# Altium PCB RoomBug.PcbDoc
Units mm, origin at the board's own origin, x right, y up, seen from the top; angles counter-clockwise.
Board outline 22 x 62 mm, 2 copper layers (Top Layer, Bottom Layer); 23 components, 12 nets, 48 pads, 0 vias.
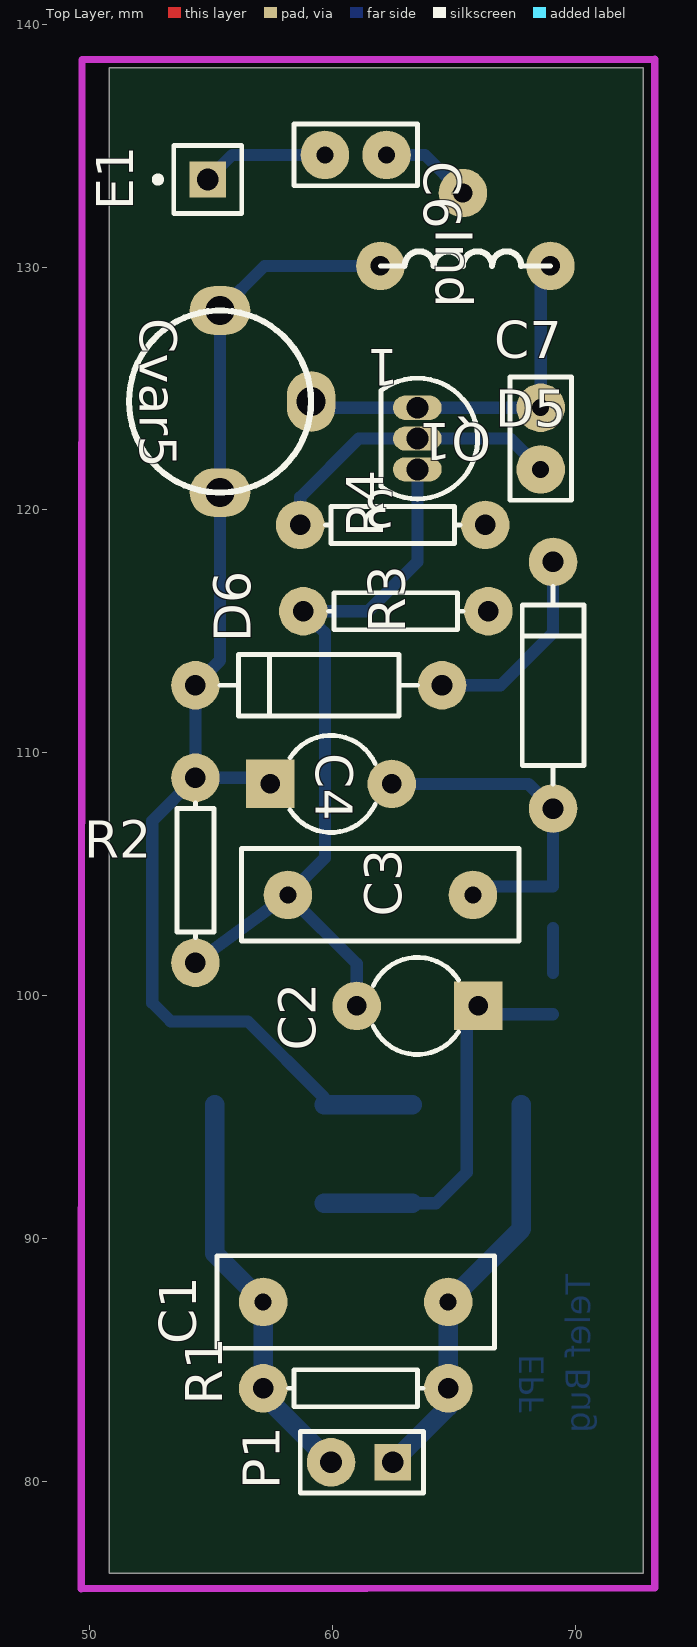
[diagram p0: Top Layer view]
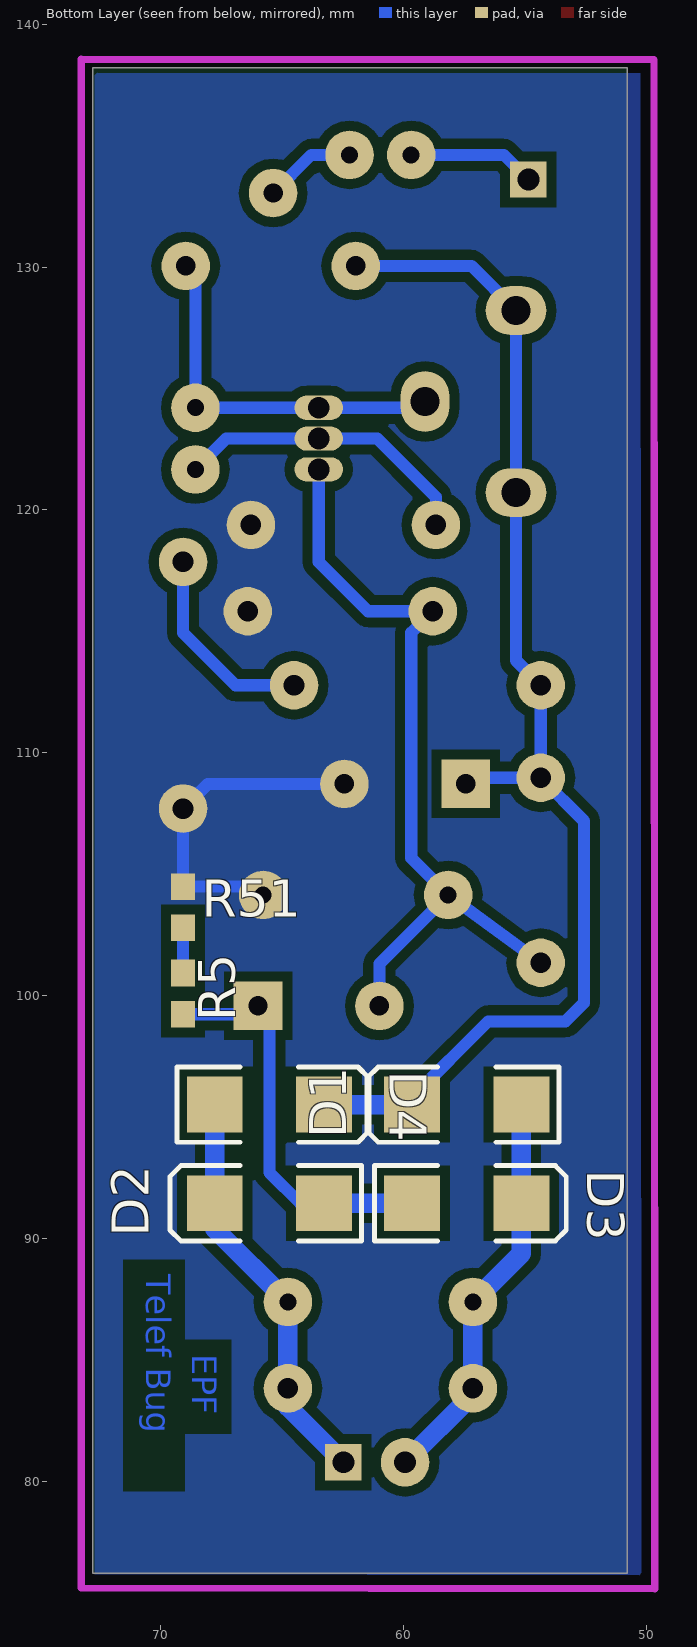
[diagram p1: Bottom Layer view, seen from below]

## Layer stack, top to bottom
Top Layer: signal copper 0.0356
Dielectric: dielectric 0.32, FR-4, Dk 4.8
Bottom Layer: signal copper 0.0356

## Board outline
50.8,76.2 72.8,76.2 72.8,138.2 50.8,138.2

## Design rules (kind name [scope] priority, off if disabled: settings)
Clearance [All] p1: gap=0.4
ComponentClearance [All] p1: gap=0.254 collisioncheckmode=3 verticalgap=0.254
PlaneConnect [All] p1: planeconnectstyle=Relief reliefexpansion=0.508 reliefentries=4 reliefconductorwidth=0.3 reliefairgap=0.254
PolygonConnect [All] p1: connectstyle=Direct reliefconductorwidth=0.254 reliefentries=4 polygonreliefangle="90 Angle"
RoomDefinition RoomBug [InComponentClass('RoomBug')] p1: confinementstyle=ConfineIn formatcopy=TRUE lockcomponents=FALSE outline 72.771,76.073 72.771,138.176 50.165,138.176 50.165,76.073
RoutingVias [All] p1: holewidth=0.8 width=2 viastyle="Through Hole" minholewidth=0.711 minwidth=1.27 maxholewidth=1 maxwidth=2
SolderMaskExpansion [All] p1: expansion=0.102
TestPointUsage [All] p1: valid=0 allowmultiple=FALSE
Testpoint [All] p1: side=15 testpointundercomponent=TRUE minsize=1.016 maxsize=2.54 preferedsize=1.524 minholesize=0 maxholesize=1.016 preferedholesize=0.813 testpointgrid=0.025 style=1023 order=0123456789
Width [All] p1: maxlimit=0.8 minlimit=0.3 preferedwidth=0.5
16 further rules are at their usual default settings.

## Components (designator, comment, footprint, x,y, rotation, side; value= is the part's Value field where it differs from the comment)
C1 "0.1u" RAD-0.3 60.96,87.376 r180 top
C2 "1u" CAPR5-4X5 63.5,99.568 r180 top
C3 "1n" RAD-0.3 61.976,104.14 r180 top
C4 "10u" CAPR5-4X5 59.944,108.712 r0 top
C6 "4.7p" RAD-0.1 60.96,134.62 r0 top
C7 "4.7p" RAD-0.1 68.58,122.936 r90 top
Cvar5 "2-20p" CapVarAmarillo 55.372,124.46 r270 top
D1 "D Schottky" DSO-C2/X2.3 57.404,95.504 r0 bottom
D2 "D Schottky" DSO-C2/X2.3 65.532,91.44 r0 bottom
D3 "D Schottky" DSO-C2/X2.3 57.404,91.44 r180 bottom
D4 "D Schottky" DSO-C2/X2.3 65.532,95.504 r180 bottom
D5 "4V7" DIODE-0.4 69.088,112.776 r90 top
D6 "4V7" DIODE-0.4 59.436,112.776 r180 top
E1 "Antenna" PIN1 54.864,133.604 r90 top
Ind "Ind3" "IND 7MM" 61.976,130.048 r0 top
P1 "Header 2" HDR1X2 62.484,80.772 r180 top
Q1 "2N3904" TO-92A 63.5,122.936 r180 top
R1 "1.5k" AXIAL-0.3 60.96,83.82 r180 top
R2 "27k" AXIAL-0.3 54.356,105.156 r90 top
R3 "4k7" AXIAL-0.3 62.611,115.824 r180 top
R4 "330" AXIAL-0.3 62.484,119.38 r180 top
R5 "Res3" CR1608-0603 69.088,100.076 r90 bottom
R51 "Res3" CR1608-0603 69.088,103.632 r90 bottom

## Footprints (in the part's own frame and the unit in brackets; to place one, negate y for a bottom-side part, rotate by r counter-clockwise, add the part's x,y. Pads: shape width x height; smd on the part's side, far side on the other; paste and mask are expansions set on the pad)
AXIAL-0.3 [mm] "Resistor; 2 Leads"
  round 2 hole 0.85: 1(-3.81,0) 2(3.81,0)
  silkscreen extent -2.77,-0.76 2.77,0.76
CAPR5-4X5 [mm] "Capacitor; 2 Leads"
  rect 2x2 hole 0.8: 1(-2.5,0)
  round 2 hole 0.8: 2(2.5,0)
  silkscreen extent -1.69,-2 1.82,2
CapVarAmarillo [mm] "Amarillo"
  oval 2.5x2 hole 1.2: 0(0,3.75)
  oval 2x2.5 hole 1.2: 1(-3.75,0) 2(3.75,0)
  silkscreen extent -3.75,-3.75 3.75,3.75
CR1608-0603 [mm] "Chip Resistor; Body 1.6 x 0.8 mm (LxW typ)"
  rect 1.1x1 smd: 1(-0.85,0) 2(0.85,0)
DIODE-0.4 [mm] "Tunnel Diode - Dependent Source Model; 2 Leads"
  round 2 hole 0.85: 1(-5.08,0) 2(5.08,0)
  silkscreen extent -4.06,-1.27 4.06,1.27
DSO-C2/X2.3 [mm] "DO-214-AA/SMB; 2 C-Bend Leads; Body 5.3 x 3.6 mm, inc. leads (LxW)"
  rect 2.3x2.3 smd: 1(-2.25,0) 2(2.25,0)
  silkscreen extent -3.8,-1.55 4.1,1.55
HDR1X2 [mm] "Connector; Header; 2 Position"
  rect 1.5x1.5 hole 0.9: 1(0,0)
  round 2 hole 0.9: 2(2.54,0)
  silkscreen extent -1.27,-1.27 3.81,1.27
"IND 7MM" [mm]
  round 2 hole 0.8: 0(7,0) 1(0,0) 2(3.4,3)
  silkscreen extent 0,0 7,0.6
PIN1 [mm] "Generic Antenna; 1 Lead"
  rect 1.5x1.5 hole 0.9: 1(0,0)
  silkscreen extent -1.4,-1.4 1.4,2.17
RAD-0.1 [mm] "Indicating Instrument; 2 Leads"
  round 2 hole 0.7: 1(-1.27,0) 2(1.27,0)
  silkscreen extent -2.54,-1.27 2.54,1.27
RAD-0.3 [mm] "Capacitor; 2 Leads"
  round 2 hole 0.7: 1(-3.81,0) 2(3.81,0)
  silkscreen extent -5.71,-1.91 5.71,1.91
TO-92A [mm] "TO, Flat Index; 3 In-Line, Axial Leads; Body Dia. 4.5mm; Leads 0.51 x 0.48 mm (max)"
  oval 2x1 hole 0.9: 1(0,-1.27) 2(0,0) 3(0,1.27)
  silkscreen extent -2.48,-2.48 1.5,2.48

## Part data
C1 C3 C6 C7: library part Cap, "Capacitor"
C2 C4: library part Cap2, "Capacitor"
Cvar5: library part CapVar1
D1 D2 D3 D4: "Schottky Diode"
D5 D6: library part "D Zener", "Zener Diode"
E1: "Generic Antenna"
P1: "Header, 2-Pin"
Q1: "NPN General Purpose Amplifier"
R1 R2 R3 R4: library part Res1, "Resistor"
R5 R51: "Resistor"

## Nets (pads, with @x,y where several pads share a name; then routed paths per layer and width w, separated by ;. In a path a pad name is that pad's centre, name@x,y a point inside that pad or via, vN(x,y) a via of type N, cw(c..) or ccw(c..) an arc to the next point about the centre after c; other vN are vias at no path point)
GND: C3.1 C4.2 D5.1 R3.1 R4.1 R51.2 | length 13.7
  Bottom Layer w0.5: C4.2 68.072,108.712 D5.1 R51.2 66.128,104.482 C3.1
NetC1_1: C1.1 D2.2 D4.1 P1.1 R1.1 | length 16.9
  Bottom Layer w0.8: P1.1 64.77,83.058 R1.1 C1.1 67.782,90.388 D4.1
NetC1_2: C1.2 D1.1 D3.2 P1.2 R1.2 | length 16.7
  Bottom Layer w0.8: D1.1 55.154,89.372 C1.2 57.15,83.566 P1.2
NetC2_1: C2.1 D2.1 D3.1 R5.1 | length 16.7
  Bottom Layer w0.5: D2.1 64.262,91.44 65.532,92.71 65.532,99.1 C2.1 66.342,99.226 R5.1
  Bottom Layer w0.8: D3.1 D2.1
NetC2_2: C2.2 C3.2 Q1.3 R2.1 R3.2 | length 32.5
  Bottom Layer w0.5: R2.1 C3.2 ; C2.2 61,101.306 C3.2 ; Q1.3 63.5,117.856 61.468,115.824 R3.2 59.69,114.935 59.69,105.664 C3.2
NetC4_1: C4.1 Cvar5.1 Cvar5.2 D1.2 D4.2 D6.2 Ind.1 R2.2 | length 52.8
  Bottom Layer w0.5: C4.1 57.19,108.966 R2.2 ; D1.2 59.654,95.794 56.515,98.933 53.34,98.933 52.578,99.695 52.578,107.188 R2.2 ; Ind.1 57.21,130.048 Cvar5.1 Cvar5.2 55.372,113.792 D6.2 R2.2
  Bottom Layer w0.8: D1.2 D4.2
NetC6_1: C6.1 E1.1 | length 5.2
  Bottom Layer w0.5: E1.1 55.88,134.62 C6.1
NetC6_2: C6.2 Ind.2 | length 3.8
  Bottom Layer w0.5: C6.2 63.804,134.62 Ind.2
NetC7_1: C7.1 Q1.2 R4.2 | length 12.6
  Bottom Layer w0.5: R4.2 58.674,120.523 61.087,122.936 67.31,122.936 C7.1
NetC7_2: C7.2 Cvar5.0 Ind.0 Q1.1 | length 15.6
  Bottom Layer w0.5: Cvar5.0 59.376,124.206 C7.2 68.58,129.652 Ind.0
NetD5_2: D5.2 D6.1 | length 8.4
  Bottom Layer w0.5: D6.1 66.929,112.776 69.088,114.935 D5.2
NetR5_2: R5.2 R51.1 | length 1.9
  Bottom Layer w0.5: R5.2 R51.1

## Polygon pours and split planes (outlines as drawn)
GND on Bottom Layer (solid, remove dead copper): 49.911,139.446 49.911,75.438 73.025,75.438 73.025,139.063

## Keep-outs
Keep-Out Layer:
  lines w0.3: 49.657,75.565 49.687,138.551 73.279,138.557 73.278,75.595 49.657,75.565

## Other copper
Bottom Layer:
  text "Telef Bug" at 70.612,88.519 h1 r90
  text "EPF" at 68.707,85.217 h1 r90

## Silkscreen, mask and mechanical layers (free items; w line width, h text height)
Drill Drawing:
  text ".LEGEND" at 73.787,73.406 h1.52
  text "Drill Drawing." at 74.041,70.993 h1.52

## Dimensions
49.657,75.565 to 49.687,138.551 on Mechanical 1
49.657,75.565 to 73.278,75.595 on Mechanical 1

## Text inside footprints (layer, text, board x,y; h text height)
Q1: Top Overlay "1" at 62.738,126.619 h1.5 r180; Top Overlay "3" at 62.611,120.777 h1.5 r180